# Altium PCB VoltageRegulator.PcbDoc
Units mil, origin at the board's own origin, x right, y up, seen from the top; angles counter-clockwise.
Board outline 945 x 1290 mil, 2 copper layers (Top Layer, Bottom Layer); 6 components, 3 nets, 13 pads, 9 vias.
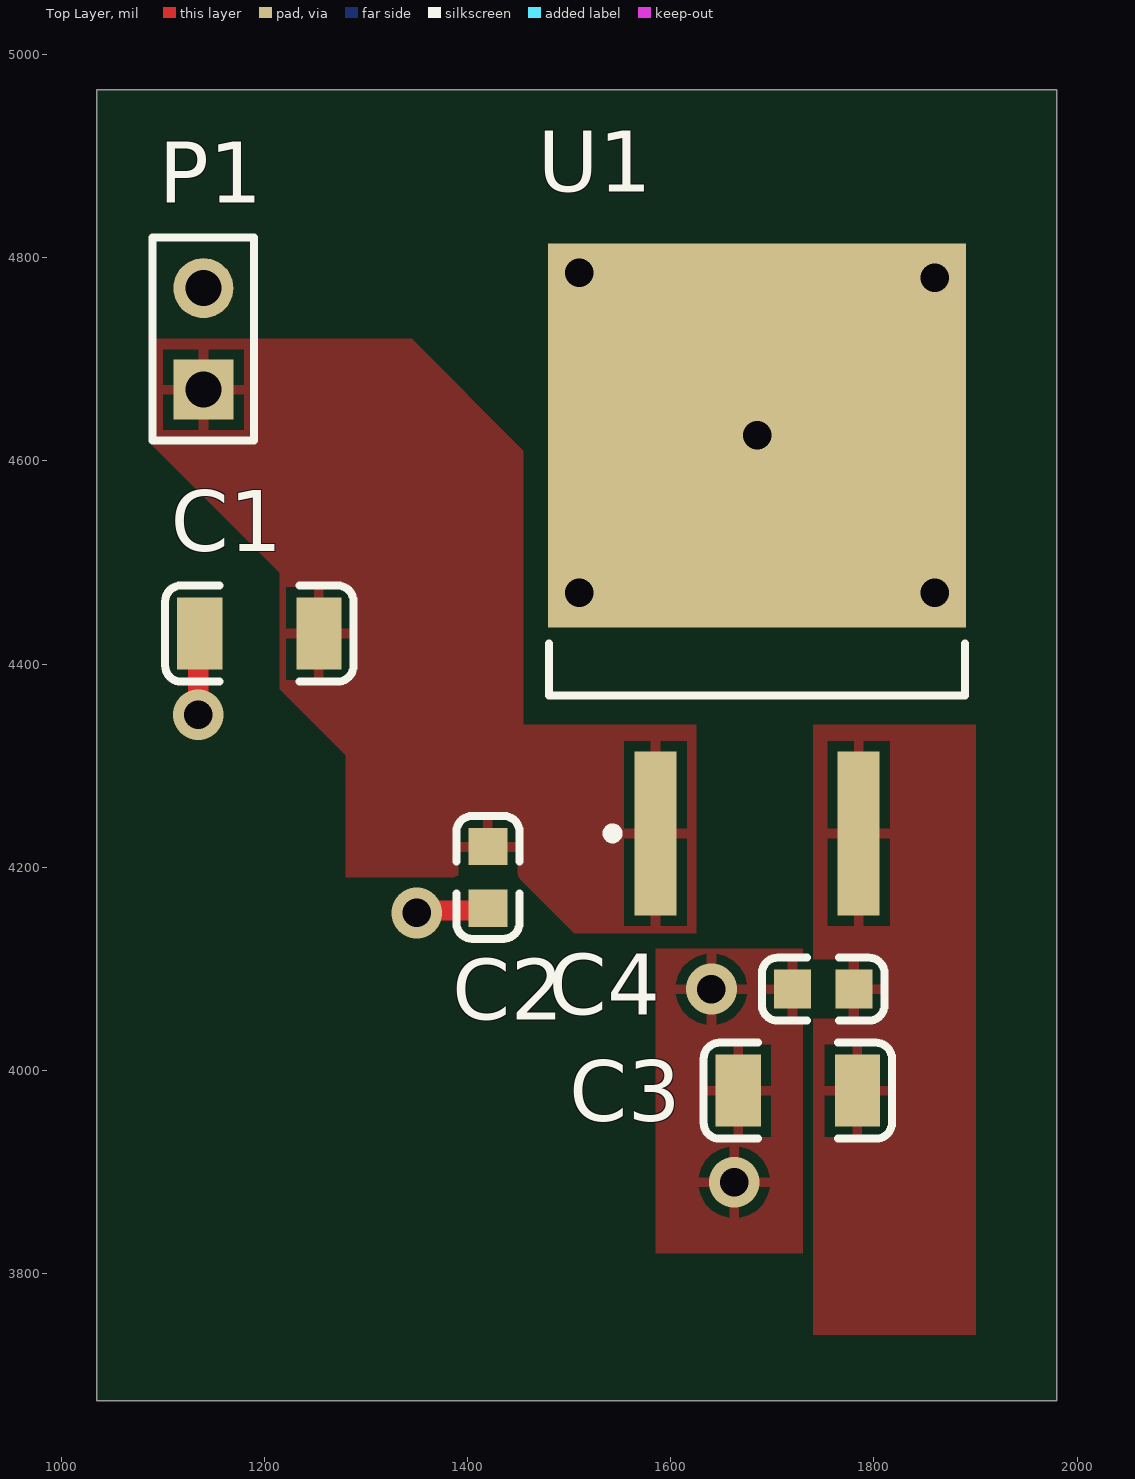
[diagram p0: Top Layer view]
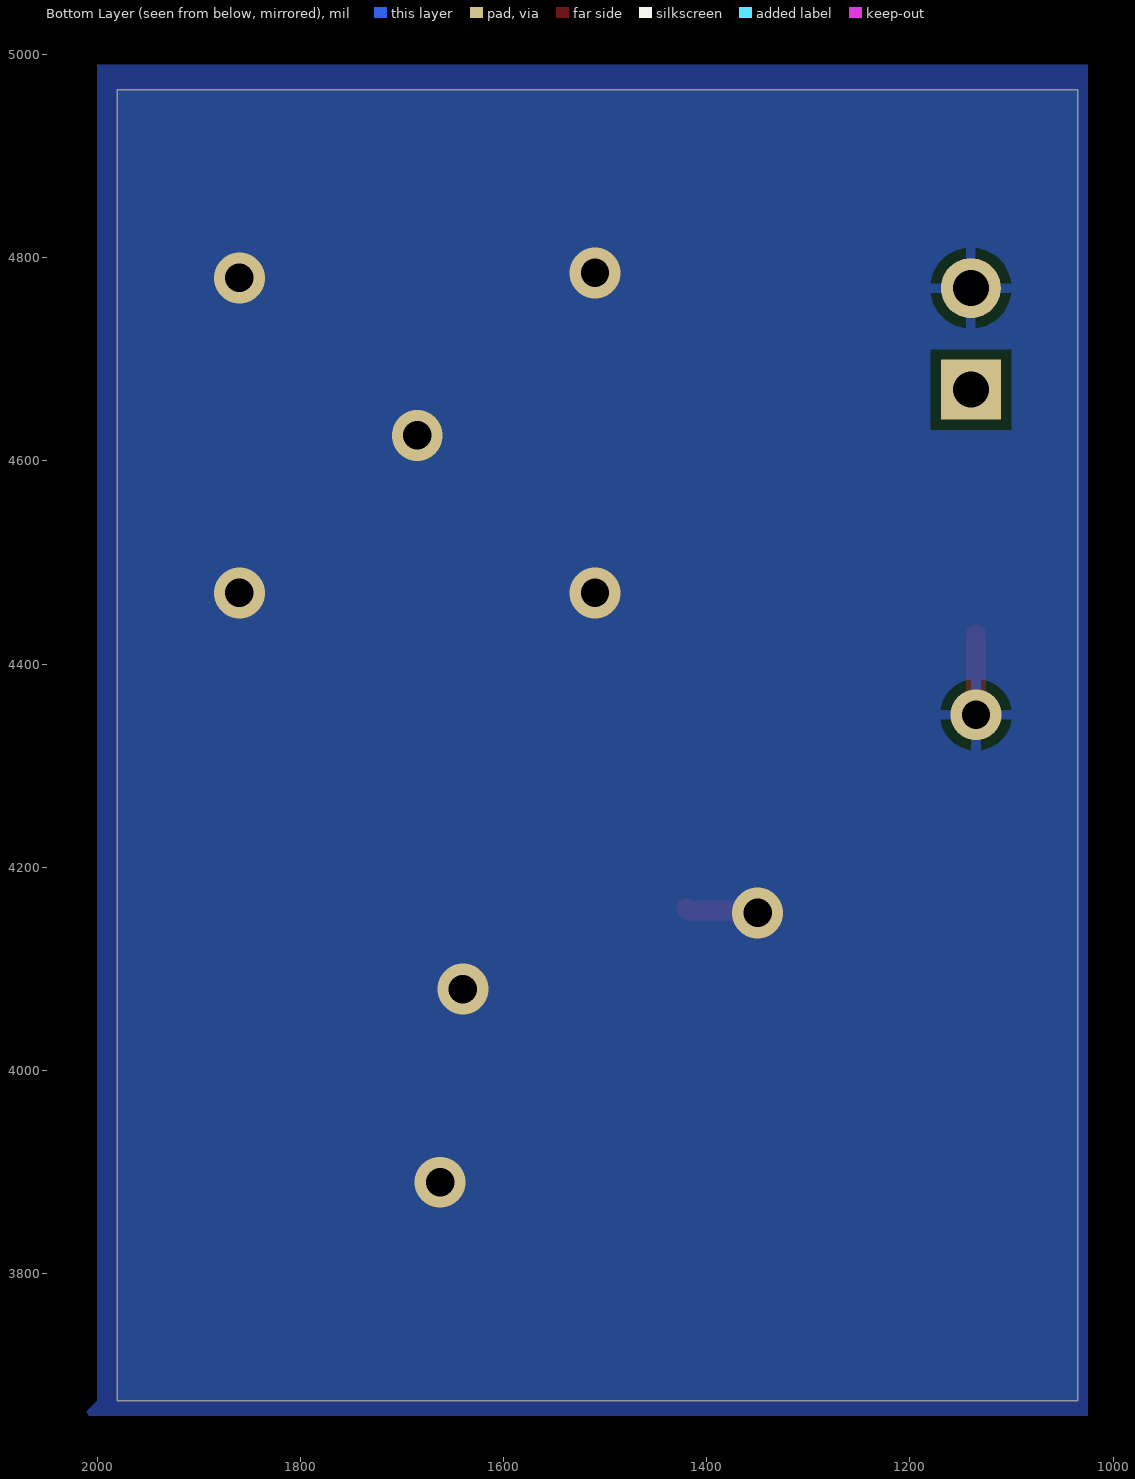
[diagram p1: Bottom Layer view, seen from below]
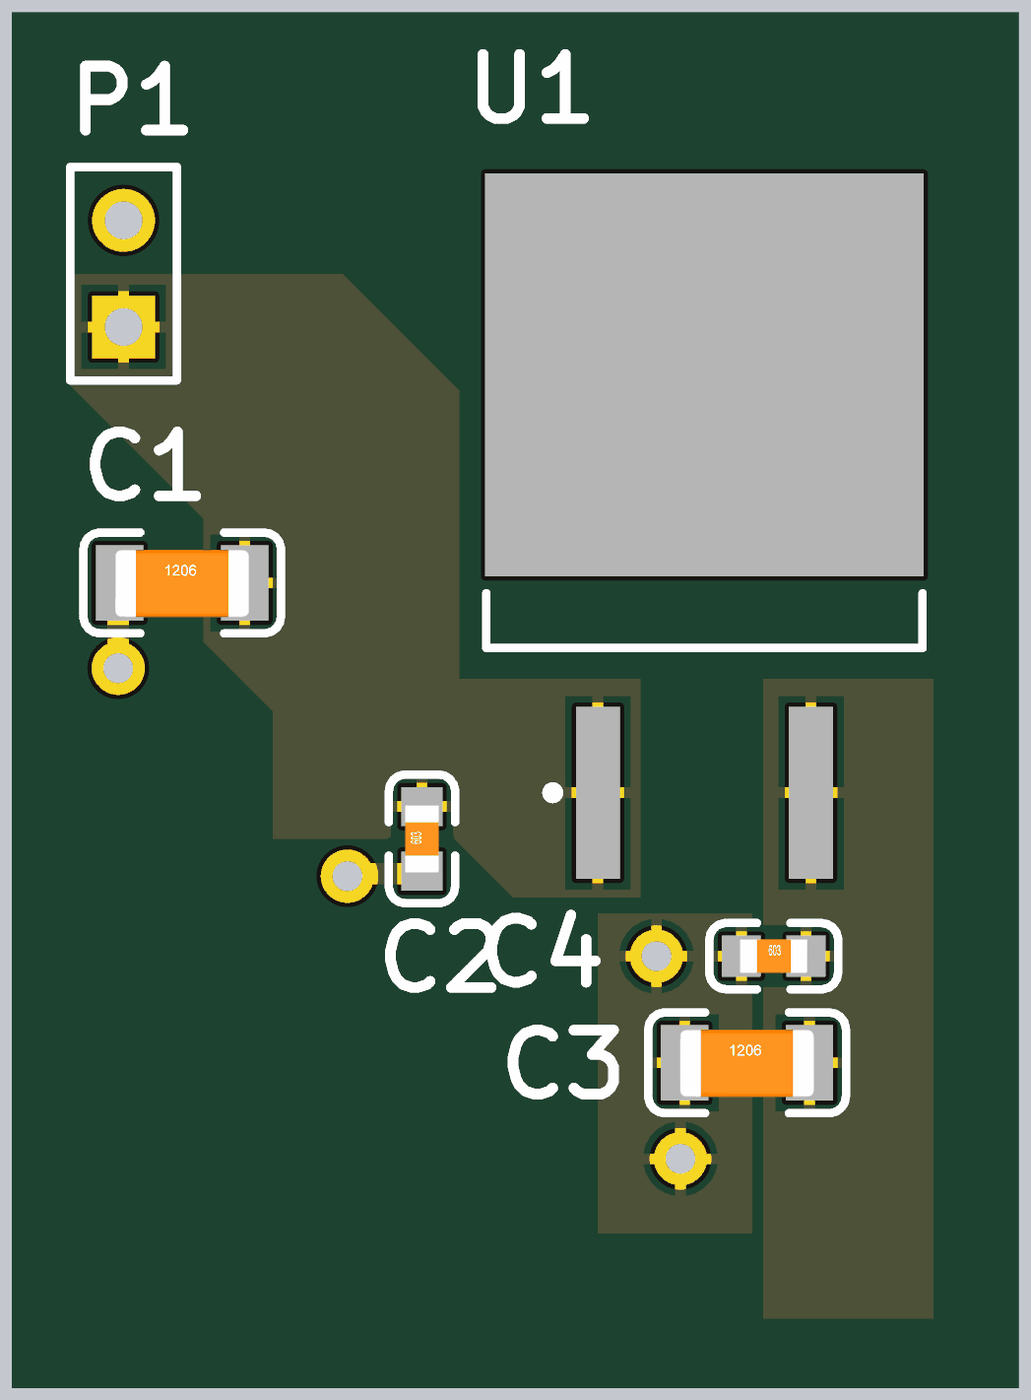
[diagram p2: 3D render of the assembled board from above, using the file's embedded part models]

## Layer stack, top to bottom
Top Solder: solder mask 0.4, Solder Resist, Dk 3.5
Top Layer: signal copper 1.4
Dielectric 1: dielectric 12.6, FR-4, Dk 4.8
Bottom Layer: signal copper 1.4
Bottom Solder: solder mask 0.4, Solder Resist, Dk 3.5

## Board outline
1035,3675 1035,4965 1980,4965 1980,3675

## Design rules (kind name [scope] priority, off if disabled: settings)
Clearance [All] p1: gap=10 ignorepadtopadclearanceinfootprint=FALSE except(0: Arc-Hole Track-Hole SMDPad-Hole THPad-Hole Via-Hole Fill-Hole Poly-Hole Region-Hole Text-Hole)
PolygonConnect [All] p1: connectstyle=Relief reliefconductorwidth=10 reliefentries=4 polygonreliefangle="90 Angle" airgapwidth=10
RoutingVias [All] p1: holewidth=28 width=50 viastyle="Through Hole" minholewidth=28 minwidth=50 maxholewidth=28 maxwidth=50
SolderMaskExpansion [All] p1: expansion=4 istentingtop=FALSE
Width [All] p1: maxlimit=20 minlimit=10 preferedwidth=10
30 further rules are at their usual default settings.

## Components (designator, comment, footprint, x,y, rotation, side; value= is the part's Value field where it differs from the comment)
C1 "10uF" 1206_C 1195,4430 r0 top
C2 "330nF" 0603_C 1420,4190 r90 top
C3 "10uF" 1206_C 1725,3980 r0 top
C4 "330nF" 0603_C 1750,4080 r0 top
P1 "Header 2" HDR1X2 1140,4670 r90 top
U1 "L7805CD2T-TR" TO-263_M 1685,4483.27 r90 top

## Footprints (in the part's own frame and the unit in brackets; to place one, negate y for a bottom-side part, rotate by r counter-clockwise, add the part's x,y. Pads: shape width x height; smd on the part's side, far side on the other; paste and mask are expansions set on the pad)
0603_C [mm]
  rect 0.93x0.98 smd: 1(-0.77,0) 2(0.77,0)
  silkscreen extent -1.53,-0.79 1.54,0.79, body extent -0.8,-0.4 0.8,0.4, height 0.3
1206_C [mm]
  rect 1.13x1.8 smd: 1(-1.49,0) 2(1.49,0)
  silkscreen extent -2.36,-1.2 2.35,1.2, body extent -1.6,-0.81 1.6,0.79, height 1
HDR1X2 [mm] "Connector; Header; 2 Position"
  rect 1.5x1.5 hole 0.9: 1(0,0)
  round 1.5 hole 0.9: 2(2.54,0)
  silkscreen extent -1.27,-1.27 3.81,1.27
TO-263_M [mm] "D2-PAK, 4-Leads, Body 9.2x10.2mm, Pitch 2.54mm, Lead Span 15.4mm, IPC Low Density"
  rect 4.1x1.05 smd: 1(-6.35,2.54) 3(-6.35,-2.54)
  rect 9.6x10.45 smd: 4(3.6,0)
  silkscreen extent -6.47,-5.2 -1.6,5.2, body extent -2.9,-5.2 6.45,5.2, height 4.6

## Part data
C1 C3: library part "1206 10uF (106) 10% 50V", "Chip capacitors", Manufacturer="Samsung Electro-Mechanics", Package=1206, PartNumber=CL31A106KBHNNNE, SuppliersPartNumber=C13585, Tolerance=10%, Voltage=50V, Capacitance=10uF, ComponentLink1Description="Supplier link", ComponentLink1URL=http://www.szlcsc.com/product/details_14236.html, Supplier=LC
C2 C4: library part "0603 330nF (334) 10% 25V", "Chip capacitors", Manufacturer="Guangdong Fenghua Advanced Tech", Package=0603, PartNumber=0603B334K250NT, SuppliersPartNumber=C1615, Tolerance=10%, Voltage=25V, Capacitance=330nF, ComponentLink1Description="Supplier link", ComponentLink1URL=http://www.szlcsc.com/product/details_1967.html, Supplier=LC
P1: "Header, 2-Pin", LatestRevisionDate=17-Jul-2002, LatestRevisionNote="Re-released for DXP Platform.", Publisher="Altium Limited"
U1: library part CMP-0244-00213-1, "Positive Voltage Regulator, 3-Pin D2PAK, Tape and Reel", ComponentLink1Description="Manufacturer URL", ComponentLink1URL=http://www.st.com, ComponentLink2Description=Datasheet, ComponentLink2URL=http://www.st.com/internet/com/TECHNICAL_RESOURCES/TECHNICAL_LITERATURE/DATASHEET/CD00000444.pdf, DatasheetVersion=16/11/2011, PackageDescription="3-Pin Transistor Outline Package 2.54 mm Pitch, 15.4 mm Lead Span (D2PAK)", PackageReference=TO-263, PackageVersion=2011

## Via types
v1: diameter 50, hole 28, Top Layer to Bottom Layer, 9 vias

## Nets (pads, with @x,y where several pads share a name; then routed paths per layer and width w, separated by ;. In a path a pad name is that pad's centre, name@x,y a point inside that pad or via, vN(x,y) a via of type N, cw(c..) or ccw(c..) an arc to the next point about the centre after c; other vN are vias at no path point)
GND: C1.1 C2.1 C3.1 C4.1 P1.2 U1.4 | length 152.5
  Top Layer w10: C1.1@1135,4428.66 C1.1
  Top Layer w20: v1(1135,4350) C1.1@1135,4428.66 ; v1(1350,4155) 1352.34,4157.34 1417.66,4157.34 C2.1
  other v1: 1662.5,3890 1640,4080 1510,4470 1860,4470 1685,4625 1860,4780 1510,4785
VBATT: C1.2 C2.2 P1.1 U1.1
"VCC 5V": C3.2 C4.2 U1.3

## Polygon pours and split planes (outlines as drawn)
GND on Top Layer "GND_L01_P006" (solid, pour order 6): 1740,4120 1740,3820 1585,3820 1585,4120
"VCC 5V" on Top Layer "VCC_5V_L01_P005" (solid, pour order 5): 1740,4340 1740,3740 1900,3740 1900,4340
VBATT on Top Layer (solid, pour order 3): 1090,4615 1215,4490 1215,4375 1280,4310 1280,4190 1450.19,4190 1505.19,4135 1625,4135 1625,4340 1455,4340 1455,4610 1345,4720 1090,4720
GND on Bottom Layer "GND_L02_P000" (solid, pour order 0): 1025,4990 1025,3660 2015,3660 2000,3675 2000,4990

## Silkscreen, mask and mechanical layers (free items; w line width, h text height)
OUTLINE:
  the board outline again, w10